# Altium PCB TurboCtrl.PcbDoc (part 2 of 2)
Units mil, origin at the board's own origin, x right, y up, seen from the top; angles counter-clockwise.
Board outline 1584.83 x 1584.83 mil, 4 copper layers (Top Layer, GND, SIGNAL, Bottom Layer), stack 61.85 mil thick; 89 components, 88 nets, 364 pads, 205 vias.
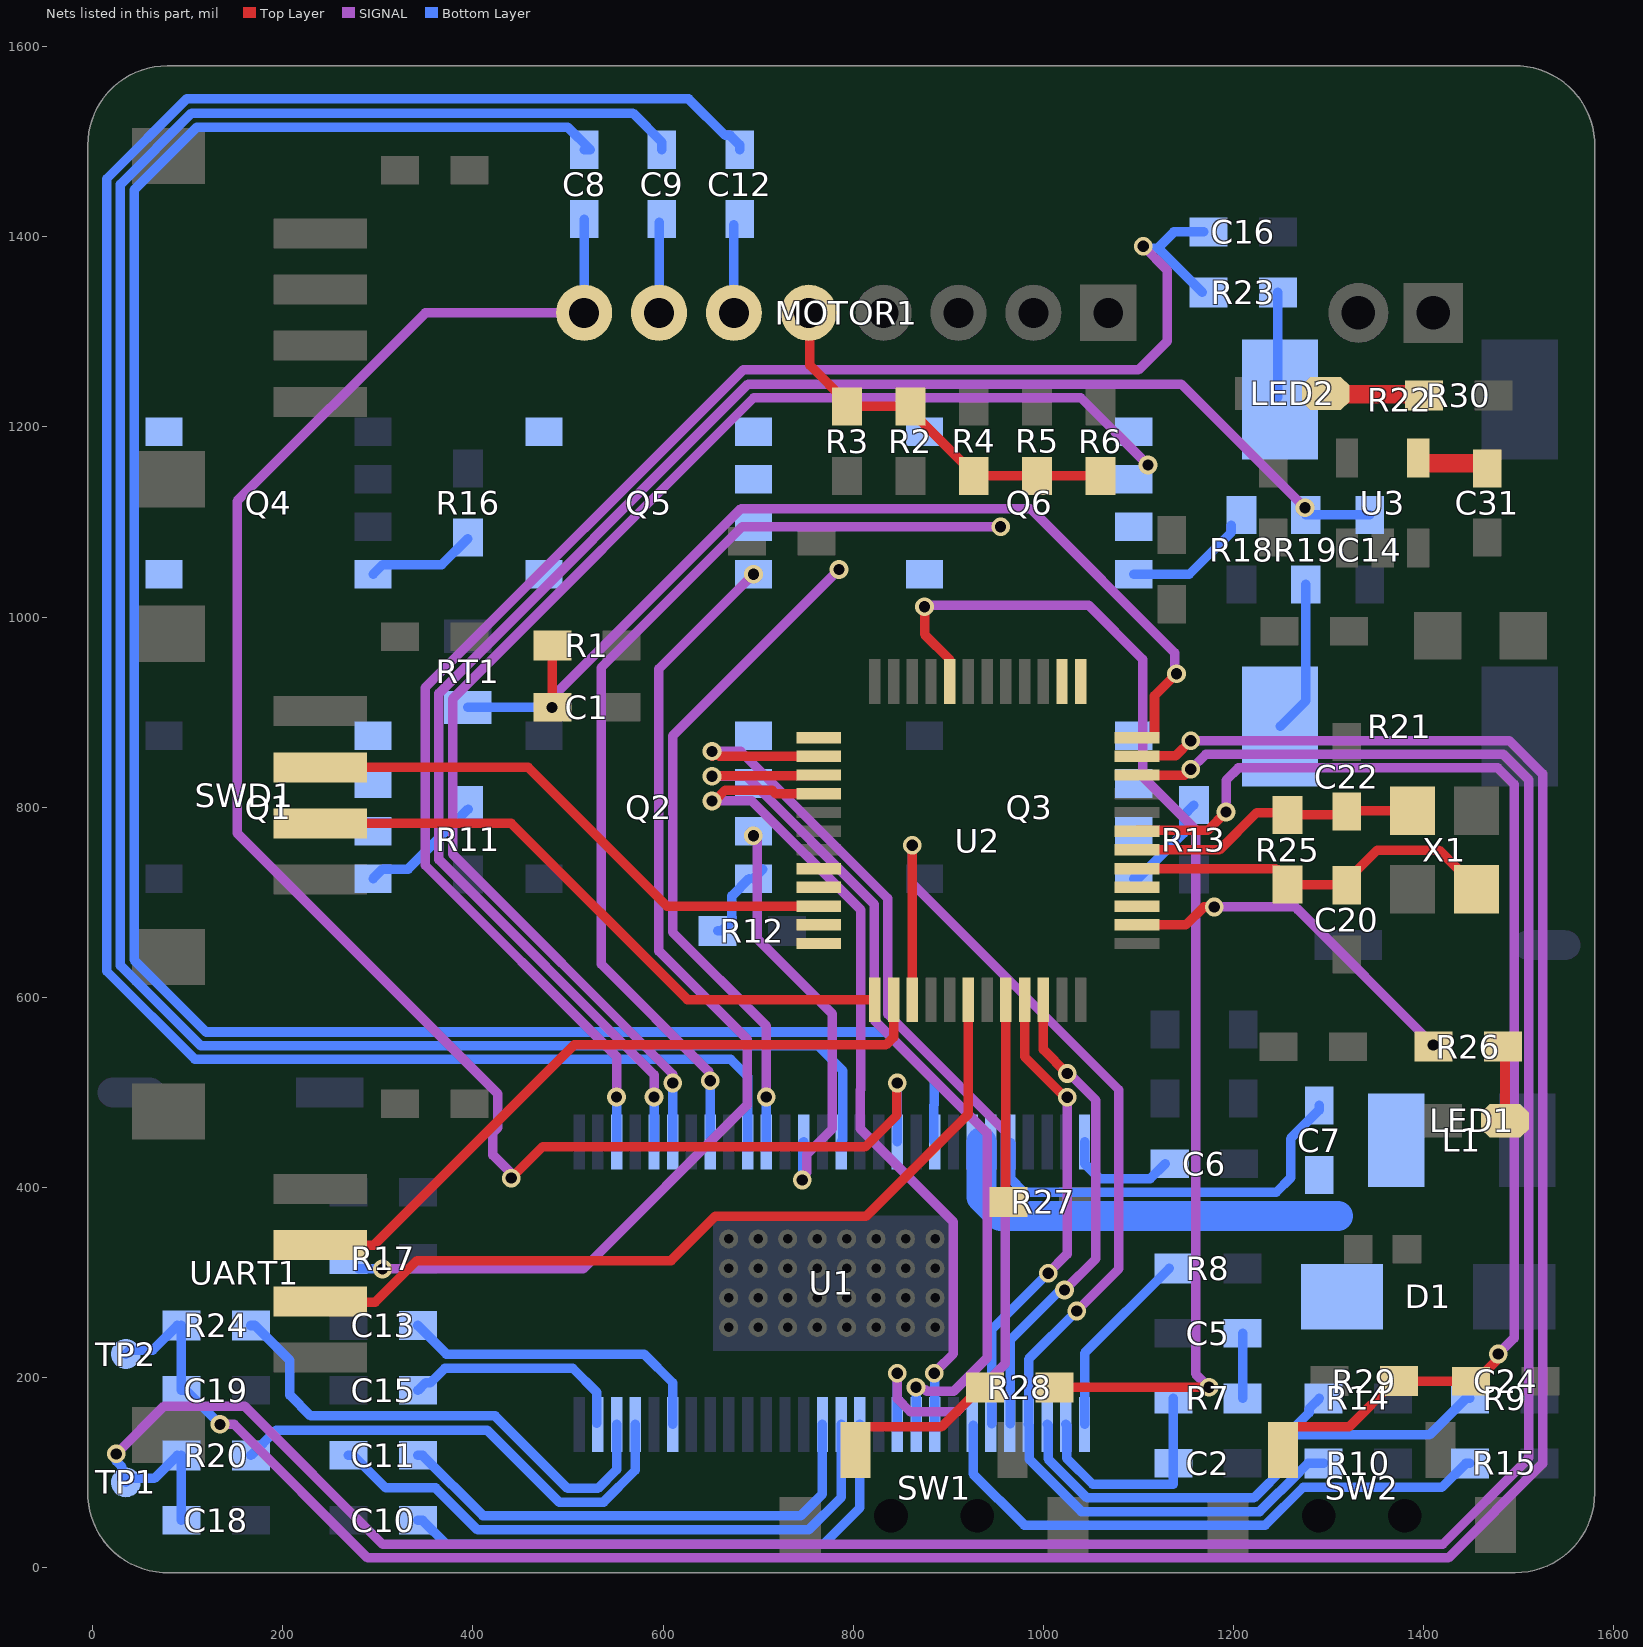
[diagram p4: the nets of this part, all layers, seen from the top]

## Via types
v1: diameter 19.68, hole 11.81, Top Layer to Bottom Layer, tented both sides, 205 vias

## Nets (pads, with @x,y where several pads share a name; then routed paths per layer and width w, separated by ;. In a path a pad name is that pad's centre, name@x,y a point inside that pad or via, vN(x,y) a via of type N, cw(c..) or ccw(c..) an arc to the next point about the centre after c; other vN are vias at no path point) (continued)
M_A: C8.1 MOTOR1.8 Q1.S Q4.D U1.46 | length 1902.9
  Top Layer w10: v1(440.31,410) 473.31,443 812.73,443 845.89,476.15 845.89,509.49 v1(846.4,510)
  SIGNAL w10: v1@440,415.42 421.14,434.28 421.14,457.94 425.98,462.78 425.98,498.86 152.01,772.83 152.01,1122.01 350,1320 MOTOR1.8@515.37,1320
  Bottom Layer w10: MOTOR1.8@517.01,1320 517.01,1418.23 C8.1@517.27,1418.5 ; U1.46@846.4,448 v1(846.4,510)
M_B: C9.1 MOTOR1.7 Q2.S Q5.D U1.41 | length 542.8
  SIGNAL w10: v1(695,770) 699.25,765.75 699.25,661.55 778.02,582.78 778.02,461.89 751.13,435 751.13,415.42 747.52,411.81 v1@747.52,409.19
  Bottom Layer w10: MOTOR1.7@595.75,1320 C9.1@595.75,1415.4 ; v1@747.13,408.8 747.13,447.16 U1.41@747.97,448
  other v1: 746.28,407.95
M_B_Current: Q5.S R19.1 R21.2 U1.39 | length 875.9
  SIGNAL w10: v1(708.6,495.29) 708.6,570 610,668.6 610,875 v1(785,1050)
  Bottom Layer w10: U1.39@708.6,448 v1(708.6,495.29) ; R21.2@1249.02,885 1275.92,911.9 R19.1@1275.92,1034.44
M_C: C12.1 MOTOR1.6 Q3.S Q6.D U1.36 | length 1120.3
  SIGNAL w10: v1(649.55,512.29) 647.87,513.97 647.87,522.13 535,635 535,946.87 683.13,1095 v1(955,1095)
  Bottom Layer w10: U1.36@649.55,448 v1(649.55,512.29) ; MOTOR1.6@674.49,1320 C12.1@674.49,1412.58
M_C_Current: Q6.S R22.2 R23.1 U1.34 | length 1563.8
  SIGNAL w10: v1(610.18,510) 610.18,519.29 378.63,750.84 378.63,913.9 695.4,1230.67 1039.33,1230.67 v1(1110,1160)
  Bottom Layer w10: U1.34@610.18,448 v1(610.18,510) ; R22.2@1246.52,1231.29 R23.1@1246.52,1341.39
MSPI_SCLK: U1.11 U2.26 | length 1125
  Top Layer w10: v1@651.42,854.17 v1@651.71,853.88 ; v1(651.42,858.79) 654.04,858.79 659.25,853.58 U2.26@763.1,853.58 ; U2.26@763.39,853.88 U2.26@763.69,853.58
  SIGNAL w10: v1(651.42,858.79) 681.74,858.79 836.33,704.2 836.33,582.41 960,458.74 960,215 909.33,164.33 860,164.33 846.4,177.93 v1(846.4,204.81)
  Bottom Layer w10: U1.11@846.4,151 v1(846.4,204.81)
MSPI_SDI: U1.9 U2.28 | length 908.5
  Top Layer w10: v1@652.98,805.55 654.6,803.92 v1@655.89,803.92 ; v1@654.6,807.26 665.18,817.83 714.81,817.83 718.44,814.21 U2.28@763.69,814.21
  SIGNAL w10: v1(651.42,806.69) 693.31,806.69 807.67,692.33 807.67,503.07 807.54,502.94 807.54,461.79 905.33,364 905.33,225.33 v1@887.58,207.58
  Bottom Layer w10: v1(885.26,204.81) 885.51,204.56 U1.9@885.51,151.26
MSPI_SDO: U1.10 U2.27 | length 996.2
  Top Layer w10: v1@651.42,830.16 652.01,829.57 v1@654.63,829.57 ; v1(651.42,832.74) 652,833.32 U2.27@763.11,833.32
  SIGNAL w10: v1(651.42,832.74) 687.53,832.74 822,698.27 822,576.47 940.85,457.62 940.85,220.85 905.64,185.64 877.31,185.64 874.81,188.15 867.94,188.15 v1@867.67,188.41
  Bottom Layer w10: U1.10@866.08,151 v1(866.08,190)
NetC2_1: C2.1 R7.1 U1.2 | length 249.8
  Bottom Layer w10: U1.2@1023.56,151 1024.56,150 1024.56,115.31 1051.88,87.99 1136.59,87.99 C2.1@1136.59,110 R7.1@1136.59,178.33
NetC5_1: C5.1 R7.2 | length 68.3
  Bottom Layer w10: R7.2@1209.59,178.33 C5.1@1209.59,246.67
NetC6_2: C6.2 U1.56 | length 120.4
  Bottom Layer w10: U1.56@1043.25,448 1043.25,425.22 1058.98,409.49 1112.38,409.49 C6.2@1127.89,425
NetC7_1: C7.1 D1.2 L1.1 U1.50 U1.51 | length 441.3
  Bottom Layer w31.5: 935,448 935,390 955,370 1310,370
NetC7_2: C7.2 U1.52 | length 432.9
  Bottom Layer w10: U1.52@965.51,447 965.51,409.49 979.92,395.08 1244.83,395.08 1260,410.25 1260,451.5 1290,481.5 C7.2@1290,486.5
NetC8_2: C8.2 U1.48 | length 2292.1
  Bottom Layer w10: C8.2@517.27,1491.5 523.5,1491.5 500,1515 109.49,1515 43.66,1449.17 43.66,639.49 119.49,563.66 834.22,563.66 885.26,512.63 885.26,487.06 884.77,486.57 884.77,449 U1.48@885.77,448
NetC9_2: C9.2 U1.43 | length 2324
  Bottom Layer w10: C9.2@598.84,1491.5 598.84,1499.43 568.28,1530 104.22,1530 29.33,1455.11 29.33,633.55 113.55,549.33 762.78,549.33 789.17,522.94 789.17,449.83 U1.43@787.34,448
NetC10_1: C10.1 U1.13 | length 578.7
  Bottom Layer w10: C10.1@342.18,50 347.18,50 372.18,25 768.68,25 807.03,63.35 U1.13@807.03,151
NetC11_1: C11.1 U1.14 | length 641.6
  Bottom Layer w10: C11.1@269.18,118.33 274.18,118.33 308.34,84.17 360.83,84.17 405,40 753.11,40 787.34,74.23 U1.14@787.34,151
NetC11_2: C11.2 U1.15 | length 534.4
  Bottom Layer w10: C11.2@342.18,118.33 347.18,118.33 410.51,55 745,55 767.66,77.66 U1.15@767.66,151
NetC12_2: C12.2 U1.38 | length 2347.5
  Bottom Layer w10: C12.2@680.41,1491.5 680.41,1496.5 670.41,1506.5 665.41,1506.5 626.91,1545 98.95,1545 15,1461.05 15,627.62 107.62,535 671,535 688.92,517.08 U1.38@688.92,448
NetC13_2: C13.2 U1.23 | length 336.8
  Bottom Layer w10: C13.2@342.18,255 372.18,225 580,225 610.18,194.82 U1.23@610.18,151
NetC14_2: C14.2 R19.2 U1.33 | length 1732.3
  SIGNAL w10: v1(590.49,495.29) 590.49,518.71 364.3,744.9 364.3,919.83 689.47,1245 1145,1245 v1(1275,1115)
  Bottom Layer w10: U1.33@590.49,448 v1(590.49,495.29) ; R19.2@1275.92,1107.44 C14.2@1343.42,1107.44
NetC15_1: C15.1 U1.27 | length 241
  Bottom Layer w10: C15.1@342.18,186.67 350.33,194.82 355.33,194.82 370.51,210 505,210 530.44,184.56 U1.27@530.44,152
NetC16_2: C16.2 R23.2 U1.31 | length 1739.7
  SIGNAL w10: v1(551.12,495.29) 551.12,537.81 349.97,738.96 349.97,925.77 684.2,1260 1100,1260 1130,1290 1130,1365 v1(1105,1390)
  Bottom Layer w10: U1.31@551.12,448 v1(551.12,495.29) ; v1(1105,1390) 1106.85,1388.15 1120.47,1388.15 ; R23.2@1167.23,1341.39 1120.47,1388.15 ; C16.2@1168.52,1405 1137.32,1405 1120.47,1388.15
NetC31_1: C31.1 U3.4 | length 69.6
  Top Layer w19.68: U3.4@1399.47,1161.87 1461.54,1161.87 1466.69,1156.71 C31.1@1466.69,1156.5
NetLED1_2: LED1.2 R26.2 | length 72.7
  Top Layer w10: LED1.2@1485.44,480.26 R26.2@1485.44,553
NetLED2_2: LED2.2 R30.1 | length 102.9
  Top Layer w19.68: LED2.2@1296.7,1235.26 1297.7,1234.26 R30.1@1399.19,1234.26
NetMOTOR1_5: MOTOR1.5 R2.2 R3.2 R4.1 R5.1 R6.1 | length 417.2
  Top Layer w10: MOTOR1.5@754.27,1318.96 754.27,1265 793.52,1225.75 R3.2@793.52,1221.5 R2.2@860.14,1221.5 860.14,1217.25 913.89,1163.5 916.01,1163.5 R4.1@931.01,1148.5 ; R4.1@926.76,1148.5 R4.1@931.01,1148.5 ; R6.1@1060,1148.5 R5.1@993.38,1148.5 R4.1@931.01,1148.5
NetQ1_G: Q1.G R11.1 | length 130.3
  Bottom Layer w10: Q1.G@295.04,725 305.04,735 331.87,735 R11.1@395,798.13
NetQ2_G: Q2.G R12.1 | length 85.4
  Bottom Layer w10: R12.1@657.35,670 661.6,670 672.35,680.75 672.35,706.81 Q2.G@690.54,725 ; Q2.G@695.04,725 Q2.G@705.04,735
NetQ3_G: Q3.G R13.1 | length 106
  Bottom Layer w10: Q3.G@1095.04,725 1099.54,725 1147.39,772.85 1147.39,791.47 R13.1@1158.14,802.22
NetQ4_G: Q4.G R16.1 | length 115.3
  Bottom Layer w10: Q4.G@295.04,1045 305.04,1055 367.12,1055 R16.1@394.72,1082.6
NetQ5_G: Q5.G R17.1 | length 1117.7
  SIGNAL w10: v1(305,314.43) 516.01,314.43 688.29,486.71 688.29,556.18 595.67,648.8 595.67,945.63 v1(695.04,1045)
  Bottom Layer w10: R17.1@279.74,314.43 v1(305,314.43)
NetQ6_G: Q6.G R18.1 | length 128.4
  Bottom Layer w10: Q6.G@1095.04,1045 1153.38,1045 1197.67,1089.29 R18.1@1197.67,1096.69
NetR8_2: R8.2 U1.1 | length 200.9
  Bottom Layer w10: U1.1@1043.25,151 1043.25,225.91 R8.2@1132.33,315
NetR9_2: R9.2 R14.1 U1.3 | length 611.6
  Bottom Layer w10: U1.3@1003.88,151 1004.88,150 1004.88,114.73 1045.95,73.66 1221.44,73.66 1255.34,107.55 1255.34,139.1 1256.23,140 ; R14.1@1290.31,178.33 1279.57,167.59 1279.57,163.33 1256.23,140 ; R9.2@1448.5,178.33 1444.25,178.33 1405.91,140 1256.23,140
NetR15_2: R15.2 U1.7 | length 622.7
  Bottom Layer w10: U1.7@926.14,150 926.14,98.86 980,45 1233.31,45 1273.24,84.92 1419.17,84.92 1444.25,110 R15.2@1448.5,110
NetR20_2: R20.2 U1.25 | length 508.8
  Bottom Layer w10: R20.2@166.5,118.33 193.17,145 415,145 490.67,69.33 537.38,69.33 570.81,102.76 U1.25@570.81,151
NetR24_2: R24.2 U1.26 | length 532.7
  Bottom Layer w10: R24.2@166.5,255 170.75,255 207.52,218.23 207.52,181.83 229.35,160 423.33,160 499.67,83.66 531.44,83.66 551.12,103.34 U1.26@551.12,151
NetR27_2: R27.2 U2.44 | length 209.7
  Top Layer w10: R27.2@960.54,387.96 960.54,525 U2.44@960.54,597.68
NetR28_1: R28.1 SW1.2 | length 167.4
  Top Layer w10: SW1.2@802.32,123.9 802.32,137.68 813.07,148.43 892.67,148.43 R28.1@934.25,190
NetU2_3: U2.3
NetU2_4: U2.4
NetU2_13: U2.13
NetU2_14: U2.14
NetU2_25: U2.25
NetU2_32: U2.32
NetU2_33: U2.33
NetU2_35: U2.35
NetU2_36: U2.36
nFAULT: U1.6 U2.45 | length 498.4
  Top Layer w10: U2.45@980.22,597.68 980.22,537.66 1022.89,495 v1(1025,495)
  SIGNAL w10: v1(1005,310) 1025,330 v1(1025,495)
  Bottom Layer w10: U1.6@945.72,151.89 945.72,250.72 v1(1005,310)
nOCTW: U1.5 U2.46 | length 508
  Top Layer w10: U2.46@999.91,597.68 999.91,545.09 v1(1025,520)
  SIGNAL w10: v1(1022.25,292.25) 1055,325 1055,492.11 v1@1027.11,520
  Bottom Layer w10: U1.5@965.01,151.5 965.01,239.5 1017.75,292.25 v1(1022.25,292.25)
NRST: C24.2 R29.1 SW2.2 U2.7 | length 1331.8
  Top Layer w10: U2.7@1098.33,774.84 1099.33,775.84 1172.91,775.84 v1(1192.07,795) ; SW2.2@1252.05,123.9 1252.05,137.68 1262.8,148.43 1321.51,148.43 R29.1@1369.5,196.42 ; R29.1@1373.76,196.42 C24.2@1449.69,196.42 1454.69,196.42 1476.42,218.15 1476.42,223.15 v1(1478.27,225)
  SIGNAL w10: v1(1192.07,795) 1192.07,828.43 1204.98,841.34 1477.82,841.34 1495,824.16 1495,241.73 v1(1478.27,225)
OSC_IN: C20.1 R25.1 U2.5 X1.3 | length 406.8
  Top Layer w10: U2.5@1098.33,735.47 1244.57,735.47 1251.5,728.54 R25.1@1251.5,713.66 ; R25.1@1256.82,718.5 C20.1@1314.56,718.5 ; C20.1@1318.56,718.5 C20.1@1314.56,718.5 ; X1.3@1455.28,713.66 1455.28,715.63 1415.91,755 1351.06,755 C20.1@1314.56,718.5
OSC_OUT: C22.1 R25.2 U2.6 X1.1 | length 308.3
  Top Layer w10: U2.6@1099.33,756.16 1100.33,755.16 1185.16,755.16 1224.17,794.17 1254.61,794.17 R25.2@1256.82,791.97 1315.53,791.97 C22.1@1319.06,795.51 1319.89,796.34 X1.1@1388.35,796.34
PB2: R28.2 U2.20 | length 1300.2
  Top Layer w10: v1(875,1011) 875,981.81 901.48,955.33 U2.20@901.48,932.32 ; R28.2@1011.5,190 v1(1174.17,190)
  SIGNAL w10: v1(875,1011) 876.24,1012.24 1047.76,1012.24 1104.33,955.67 1104.33,832.36 1160,776.69 1160,204.17 v1(1174.17,190)
PC13: R26.1 U2.2 | length 379.6
  Top Layer w10: U2.2@1098.33,676.42 1149.92,676.42 1168.71,695.21 v1(1179.64,695.21)
  SIGNAL w10: v1(1179.64,695.21) 1264.79,695.21 1267.67,692.33 v1(1410,550)
PWRGD: R10.2 U1.4 U2.39 | length 1290.8
  Top Layer w10: U2.39@862.11,597.68 v1(862.11,760)
  SIGNAL w10: v1(862.11,760) 862.11,720 1079.17,502.94 1079.17,314.43 v1(1035,270.26)
  Bottom Layer w10: U1.4@984.19,151 985.19,150 985.19,114.15 1040.01,59.33 1227.38,59.33 1269.67,101.62 1269.67,101.71 1277.95,110 R10.2@1294.57,110 ; U1.4@984.33,151.14 984.33,219.6 v1(1035,270.26)
SO1: C18.1 R20.1 TP1.1 U2.10 | length 2912.4
  Top Layer w10: U2.10@1098.33,833.9 1148.9,833.9 v1(1155,840)
  SIGNAL w10: v1(25,120) 75.17,170.17 159.83,170.17 305,25 1420,25 1510.67,115.67 1510.67,828.76 1483.76,855.67 1170.67,855.67 v1(1155,840)
  Bottom Layer w10: v1(25,120) 25,112.38 30.89,106.49 TP1.1@30.89,94.11 ; TP1.1@35,90 39.11,94.11 65.03,94.11 R20.1@89.25,118.33 ; C18.1@93.5,50 R20.1@93.5,118.33
SO2: C19.1 R24.1 TP2.1 U2.11 | length 2853.8
  Top Layer w10: U2.11@1098.33,853.58 1099.04,854.29 1139.29,854.29 v1(1155,870)
  SIGNAL w10: v1(133.96,151) 149,151 289.33,10.67 1425.94,10.67 1525,109.73 1525,835 1490,870 v1(1155,870)
  Bottom Layer w10: TP2.1@35,225 39.11,229.11 63.36,229.11 R24.1@89.25,255 ; R24.1@93.5,255 C19.1@93.5,186.67 98.5,186.67 133.96,151.2 v1(133.96,151)
SWDCLK: SWD1.3 U2.37 | length 660
  Top Layer w10: SWD1.3@239.45,782.97 440.31,782.97 625.6,597.68 U2.37@822.74,597.68
SWDIO: SWD1.2 U2.34 | length 584.7
  Top Layer w10: SWD1.2@239.45,842.03 457.97,842.03 603.9,696.1 U2.34@763.69,696.1
TEMP: C1.1 R1.1 RT1.1 U2.12 | length 1078.8
  Top Layer w10: C1.1@483.5,905 R1.1@483.5,970 ; U2.12@1098.33,873.27 1115.83,873.27 1116.83,874.27 1116.83,917.31 v1(1140,940.47)
  SIGNAL w10: v1@484.93,906.79 484.93,917.06 682.03,1114.17 986.36,1114.17 1138.15,962.39 1138.15,942.33 v1(1140,940.47)
  Bottom Layer w10: RT1.1@394.75,904.94 v1(483.07,904.94)
USART1_RX: U2.38 UART1.2 | length 733.1
  Top Layer w10: UART1.2@239.45,339.53 295.97,339.53 506.44,550 834.33,550 842.43,558.1 U2.38@842.43,597.68
USART1_TX: U2.42 UART1.3 | length 884.5
  Top Layer w10: UART1.3@239.45,280.47 240.45,279.47 297.15,279.47 341.03,323.35 608.35,323.35 655,370 813.89,370 921.17,477.28 U2.42@921.17,597.68
pads on no net: I2C.0 SW1.0 SW2.0 SWD1.0 U1.55 UART1.0 X1.2 X1.4
copper on no net: | length 62
  Bottom Layer w15: 681,358 712,358 743,358

## Polygon pours and split planes (outlines as drawn)
DGND on Top Layer "DGND_L01_P000" (solid, remove dead copper, pour order 0): 1500,1570 cw(c1500,1500) 1570,1500 1570,80 cw(c1495,80) 1495,5 80,5 cw(c80,80) 5,80 5,1500 cw(c75,1500) 75,1570
DGND on SIGNAL "DGND_L03_P006" (solid, remove dead copper, pour order 6): 1485,1575 cw(c1485,1485) 1575,1485 1575,90 cw(c1485,90) 1485,0 99.14,0 cw(c99.14,94.14) 5,94.14 5,1500 cw(c80,1500) 80,1575
DCBUS on Bottom Layer "DCBUS_L04_P010" (solid, remove dead copper, pour order 10): 59.18,740 59.18,648.8 135.75,572.22 301.72,572.22 305.73,640.06 302.8,642.98 275.79,670 245.99,670 245.99,701.24 235.45,711.78 235.45,740
DCBUS on Bottom Layer "DCBUS_L04_P008" (solid, remove dead copper, pour order 8): 457.28,740 621.24,740 621.24,600 616.24,605 455,605
GND on GND (split plane): 14.48,24.82 17.41,21.62 14.12,24.91 11.56,28.63
GND on GND (split plane): 24.82,14.48 28.63,11.56 24.91,14.12 21.62,17.41
GND on GND (split plane): -0.09,50.05 1.14,47.09 -0.79,51.38 -1.77,55.4
GND on GND (split plane): 6.09,36.8 8.15,33.57 5.46,37.46 3.68,41.42
GND on GND (split plane): 50.05,-0.09 55.4,-1.77 51.38,-0.78 47.09,1.14
GND on GND (split plane): 64.17,-3.87 70.1,-4.65 66.19,-4.42 61.85,-3.36
GND on GND (split plane): 78.77,1579.76 1500.2,1579.76 1501.48,1579.51 1501.51,1579.59 1501.52,1579.59 1501.51,1579.51 1503.36,1579.43 1510.59,1578.48 1517.72,1576.9 1524.68,1574.7 1531.43,1571.91 1537.91,1568.54 1544.06,1564.61 1549.85,1560.17 1555.24,1555.24 1560.17,1549.85 1564.61,1544.06 1568.54,1537.91 1571.91,1531.43 1574.7,1524.68 1576.9,1517.72 1578.48,1510.59 1579.43,1503.36 1579.51,1501.51 1579.59,1501.52 1579.59,1501.51 1579.51,1501.48 1579.76,1500.2 1579.76,78.74 1579.75,78.74 1579.43,71.45 1578.48,64.21 1576.9,57.08 1574.7,50.12 1571.91,43.37 1568.54,36.9 1564.61,30.74 1560.17,24.95 1555.24,19.57 1549.85,14.63 1544.06,10.19 1537.91,6.27 1531.43,2.9 1524.68,0.1 1517.72,-2.09 1510.59,-3.67 1503.36,-4.63 1496.06,-4.94 1496.06,-4.96 75,-4.96 73.83,-4.73 73.81,-4.82 73.8,-4.82 73.81,-4.73 71.45,-4.63 64.21,-3.67 57.08,-2.09 50.12,0.1 43.37,2.9 36.9,6.27 30.74,10.19 24.95,14.63 19.57,19.57 14.63,24.95 10.19,30.74 6.27,36.9 2.9,43.37 0.1,50.12 -2.09,57.08 -3.67,64.21 -4.63,71.45 -4.73,73.81 -4.82,73.8 -4.82,73.81 -4.73,73.83 -4.96,75 -4.96,1496.06 -4.94,1496.06 -4.63,1503.36 -3.67,1510.59 -2.09,1517.72 0.1,1524.68 2.9,1531.43 6.27,1537.91 10.19,1544.06 14.63,1549.85 19.57,1555.24 24.95,1560.17 30.74,1564.61 36.9,1568.54 43.37,1571.91 50.12,1574.7 57.08,1576.9 64.21,1578.48 71.45,1579.43 78.74,1579.75 78.74,1579.76 78.77,1579.76
GND on GND (split plane): 36.8,6.09 41.42,3.68 37.46,5.46 33.57,8.15
GND on GND (split plane): -4.83,1503.37 -5.02,1499.04 -5.02,1504.31 -4.09,1508.96
GND on GND (split plane): -3.87,64.17 -3.36,61.85 -4.42,66.19 -4.65,70.1
GND on GND (split plane): -2.29,1517.77 -2.78,1515.54 -1.8,1520.49 -0.26,1524.21
GND on GND (split plane): 6.09,1538.01 2.98,1532.02 4.52,1535.74 7.32,1539.93
GND on GND (split plane): 14.48,1549.98 11.05,1545.51 13.68,1549.45 17.41,1553.19
GND on GND (split plane): 24.82,1560.32 21.62,1557.39 25.35,1561.12 29.29,1563.76
GND on GND (split plane): 36.8,1568.71 34.87,1567.48 39.07,1570.29 42.78,1571.82
GND on GND (split plane): 57.03,1577.09 50.6,1575.06 54.31,1576.6 59.26,1577.58
GND on GND (split plane): 1504.31,-5.01 1499.04,-5.01 1503.37,-4.83 1508.96,-4.09
GND on GND (split plane): 1520.49,-1.8 1515.54,-2.78 1517.77,-2.29 1524.21,-0.26
GND on GND (split plane): 1535.74,4.52 1532.02,2.98 1538.01,6.09 1539.93,7.32
GND on GND (split plane): 1549.45,13.68 1545.51,11.05 1549.98,14.48 1553.18,17.41
GND on GND (split plane): 1561.12,25.35 1557.39,21.62 1560.32,24.82 1563.75,29.29
GND on GND (split plane): 1570.29,39.07 1567.48,34.87 1568.71,36.8 1571.82,42.78
GND on GND (split plane): 1576.6,54.31 1575.06,50.6 1577.09,57.03 1577.58,59.26
GND on GND (split plane): 1579.82,70.49 1578.89,65.84 1579.63,71.43 1579.82,75.77
GND on GND (split plane): 1523.73,1575.48 1527.98,1573.55 1524.75,1574.89 1519.65,1576.5
GND on GND (split plane): 1537.51,1569.24 1541.33,1566.59 1538.01,1568.71 1533.54,1571.03
GND on GND (split plane): 71.43,1579.63 65.84,1578.89 70.49,1579.82 75.77,1579.82
GND on GND (split plane): 1509.07,1579.15 1513.51,1578.04 1510.63,1578.67 1505.03,1579.41
GND on GND (split plane): 1575.48,1523.73 1576.5,1519.65 1574.89,1524.75 1573.55,1527.98
GND on GND (split plane): 1579.15,1509.06 1579.41,1505.03 1578.67,1510.63 1578.04,1513.51
GND on GND (split plane): 1549.94,1560.63 1553.18,1557.39 1549.98,1560.32 1546.25,1563.18
GND on GND (split plane): 1569.24,1537.51 1571.03,1533.54 1568.71,1538.01 1566.59,1541.33
GND on GND (split plane): 1560.63,1549.94 1563.18,1546.25 1560.32,1549.98 1557.39,1553.18

## Other copper
SIGNAL:
  region net DCBUS: 905.33,720 1050.94,565 ccw(c1056.97,571.04) 1056.97,562.5 1085,562.5 ccw(c1085,567.5) 1090,567.5 1090,600 945,760 ccw(c940.92,755.92) 940.92,761.69 909.41,761.69 ccw(c909.41,755.92) 905.33,760 ccw(c913.45,751.88) 901.97,751.88 901.97,728.12 ccw(c913.45,728.12)
  region net DCBUS: 225,455 185.85,455 cw(c185.85,465.85) 175,465.85 175,510 80,715 80,767.17 cw(c92.83,767.17) 92.83,780 120,780 cw(c120,770) 130,770 130,727.56 225,510
  region: 225,455.96
Bottom Layer:
  rectangle net DCBUS: 81.15,711.25 180,785
  rectangle net GND: 248.91,1078.45 349.61,1211.49
  rectangle net NetC7_1: 920,420 950,475
  region net GND: 1460,821.32 1460,1365 ccw(c1436.85,1365) 1436.85,1388.15 1388.15,1388.15 ccw(c1388.15,1360) 1360,1360 1363.89,1308.62 cw(c1337.2,1315.82) 1330,1289.13 cw(c1323.62,1325.75) 1287.14,1318.63 1283.12,1455.16 cw(c1341.78,1456.89) 1350,1515 1460,1515 cw(c1460,1430) 1545,1430 1545,826.32 cw(c1540,826.32) 1540,821.32
  region net DCBUS: 175,520 174.3,519.3 174.3,460 ccw(c179.3,460) 179.3,455 265,455 ccw(c265,475) 285,475 285,515 ccw(c280,515) 280,520
  region net M_C: 906.46,1030.07 ccw(c1021.52,1030.07) 1021.52,915 cw(c1021.52,881.52) 1055,881.52 ccw(c1063.98,881.52) 1063.98,872.54 1106.85,872.54 ccw(c1106.85,879.12) 1113.43,879.12 1113.43,961.52 ccw(c1068.97,961.52) 1068.97,1005.98 1060.23,1005.98 cw(c1060.23,1028.99) 1037.23,1028.99 1037.23,1030
  region net M_B_Current: 675.74,1210 675.74,1080.2 719.26,1080.2 cw(c719.54,1037.74) 762,1038 762,691 ccw(c808,691) 808,645 875,645 cw(c875.01,615.09) 886.46,642.72 ccw(c953.53,710.02) 953.52,615 1187.03,615 ccw(c1187.03,717.42) 1289.45,717.42 1289.45,925.22 ccw(c1269.67,925.22) 1269.67,945 1246.4,945 ccw(c1241.94,913.4) 1210.34,917.84 1208.04,729.39 cw(c1162.38,720.67) 1171.08,675 1010,675 927.5,705 856.4,705 cw(c856.4,715) 846.4,715 846.4,1147.6 ccw(c824,1147.61) 824,1170 774.2,1170 cw(c774.2,1190) 754.2,1190 ccw(c734.21,1190) 734.2,1210
  region net NetC7_1: 1271.99,250 1355,250 1355,325 cw(c1375,325) 1375,345 ccw(c1375,370) 1400,370 1400,405 ccw(c1370,405) 1370,435 1283.97,435 ccw(c1283.97,423.02) 1271.99,423.02
  region net M_C: 672.52,1349.45 cw(c672.56,1322.01) 700,1322.05 700,1308.62 ccw(c770.91,1379.54) 770.91,1279.25 967.98,1279.25 cw(c967.98,1210) 1037.23,1210 cw(c1008.19,1210) 1008.19,1180.97 840.46,1180.97 cw(c840.45,1280.96) 778.22,1202.69 ccw(c725.98,1126.4) 708.95,1217.28 cw(c717.35,1292.11) 645,1271.24 645,1321.93 cw(c672.52,1321.93)
  region net M_C_Current: 1075,1213.51 cw(c1085,1213.51) 1085,1223.51 1108.44,1223.51 ccw(c1108.44,1283.57) 1168.5,1283.57 cw(c1176.36,1283.57) 1176.36,1291.43 1243.5,1291.43 cw(c1243.5,1274.93) 1260,1274.93 1260,1189.47 cw(c1237.03,1189.47) 1237.03,1166.5 1210,1166.5 ccw(c1210,1126.5) 1170,1126.5 1168.5,1075 cw(c1162.22,1076.28) 1160.94,1070 1142.94,1070 1105,1070 cw(c1102.31,1111.31) 1075,1080.2 cw(c1086.83,1085.1) 1075,1090
  region net M_B: 456.1,1034.95 ccw(c555.08,1032.52) 552.65,933.54 593.69,933.54 cw(c593.69,860.08) 667.15,860.08 667.15,765.72 ccw(c677.87,765.72) 677.87,755 746.65,755 ccw(c746.65,762.55) 754.2,762.55 754.2,880.89 ccw(c654.2,880.89) 695.06,972.16 cw(c695.06,1030) 637.23,1030
  region net M_A: 330.05,760 330.05,904.94 ccw(c216.1,916.77) 301.72,992.89 242.26,1017.44 cw(c269.19,1037.18) 235.8,1037.18 ccw(c218.52,1030.03) 231.73,1043.27 225,1050 ccw(c200.87,1025.88) 200.86,1060 67.07,1060 ccw(c67.06,1042.95) 55,1055 55,1003.5 ccw(c109.86,1003.5) 71.07,964.71 86.84,948.94 ccw(c147.63,1009.73) 147.63,923.76 206.91,923.76 cw(c206.92,859.73) 252.19,905 cw(c197.15,849.95) 275,849.94 275,760
  region net M_B: 593.78,1350 cw(c594.39,1319.39) 625,1319.97 630.82,1244.92 cw(c580.54,1217.22) 637.23,1226.27 637.23,1210 cw(c577.23,1210) 577.23,1150 485,1150 cw(c485,1180) 455,1180 455,1210 cw(c470,1210) 470,1225 520,1225 ccw(c517.5,1267.5) 560,1270 565,1321.22 cw(c593.78,1321.22)
  region net M_A: 79.23,1200 79.23,1250.06 cw(c179.23,1250.06) 179.23,1350.06 520,1350.06 cw(c520.04,1323.71) 546.39,1323.61 546.39,1320 cw(c469.2,1320) 469.2,1242.8 270.03,1242.8 ccw(c270.03,1210) 238.79,1200
  region net M_C: 1114.33,890 1114.33,765.89 cw(c1108.44,765.89) 1108.44,760 1060.66,760 cw(c1060.66,765.66) 1055,765.66 1055,881.52 cw(c1063.48,881.52) 1063.48,890
  region: 248.91,1211.49
  region net M_C: 930.28,1030.07
  region: 980,505
  region net M_A: 275,760
  region: 557.53,1445.74

## Silkscreen, mask and mechanical layers (free items; w line width, h text height)
Top Overlay:
  lines w10: 1175,935 1175,1280 1550,1280 1550,935 1175,935 ; 1200,605 1515,605 1515,920 1200,920 1200,605
  text "I2C" at 130,1505 h60
  text "VCC+" at 1500,1425 h60 r270
  text "20250424 / TFoc1-1.2.0" at 320,1150 h60
  text "SWD" at 130,995 h60
  text "UART" at 130,500 h60
  text "3.3V" at 1230,450 h60
  text "DGND" at 1158.44,315 h60
  text "PGND" at 1433.44,315 h60
  text "RST" at 1158.44,175 h60
  text "PB2" at 785,170 h60
Bottom Overlay:
  region: 1380,80 1380,210 1400,145
  text "SO2" at 50,310 h39.37 r90
  text "SO1" at 50,180 h39.37 r90
Bottom Paste:
  region: 515,1355
Bottom Solder:
  region: 1075,1213.51 cw(c1085,1213.51) 1085,1223.51 1108.44,1223.51 ccw(c1108.44,1283.57) 1168.5,1283.57 cw(c1176.36,1283.57) 1176.36,1291.43 1243.5,1291.43 cw(c1243.5,1274.93) 1260,1274.93 1260,1189.47 cw(c1237.03,1189.47) 1237.03,1166.5 1210,1166.5 ccw(c1210,1126.5) 1170,1126.5 1168.5,1075 cw(c1162.22,1076.28) 1160.94,1070 1142.94,1070 1105,1070 cw(c1102.31,1111.31) 1075,1080.2 cw(c1086.83,1085.1) 1075,1090
  region: 672.52,1349.45 cw(c672.56,1322.01) 700,1322.05 700,1308.62 ccw(c770.91,1379.54) 770.91,1279.25 967.98,1279.25 cw(c967.98,1210) 1037.23,1210 cw(c1008.19,1210) 1008.19,1180.97 840.46,1180.97 cw(c840.45,1280.96) 778.22,1202.69 ccw(c725.98,1126.4) 708.95,1217.28 cw(c717.35,1292.11) 645,1271.24 645,1321.93 cw(c672.52,1321.93)
  region: 593.78,1350 cw(c594.39,1319.39) 625,1319.97 630.82,1244.92 cw(c580.6,1217.24) 637.23,1226.27 cw(c612.21,1231.08) 607.4,1206.06 455.52,1206.07 cw(c470,1210) 470,1225 520,1225 ccw(c517.5,1267.5) 560,1270 565,1321.22 cw(c593.78,1321.22)
  region: 79.23,1206.06 79.23,1250.06 cw(c179.23,1250.06) 179.23,1350.06 520,1350.06 cw(c520.04,1323.71) 546.39,1323.61 546.39,1320 cw(c469.2,1320) 469.2,1242.8 270.03,1242.8 ccw(c270.03,1210) 237.47,1206.06
  region: 330.05,760 330.05,904.94 ccw(c216.1,916.77) 301.72,992.89 242.26,1017.44 cw(c269.19,1037.18) 235.8,1037.18 ccw(c218.53,1030.04) 231.73,1043.27 225,1050 ccw(c200.87,1025.88) 200.87,1060 67.22,1060 ccw(c67.06,1042.95) 55,1055 55,1003.5 ccw(c109.86,1003.5) 71.07,964.71 86.84,948.94 ccw(c147.63,1009.73) 147.63,923.76 206.91,923.76 cw(c206.92,859.74) 252.19,905 cw(c197.16,849.95) 275,849.94 275,760
Mechanical 1:
  lines w10: 0,75 0,1496.06 cw(c78.74,1496.06) 78.74,1574.8 1500.2,1574.8 ; 0,78.74 ccw(c78.74,78.74) 78.74,0 ; 75,0 1496.06,0 ccw(c1496.06,78.74) 1574.8,78.74 1574.8,1500.2 ; 1496.06,1574.8 cw(c1496.06,1496.06) 1574.8,1496.06

## Text inside footprints (layer, text, board x,y; h text height)
U1: Bottom Overlay "*" at 1050.25,128.5 h50 r270; Mechanical 13 "*" at 1005.25,175 h50 r270